# EAGLE board Simple JWS (EAGLE 7.7.0), part 1 of 2
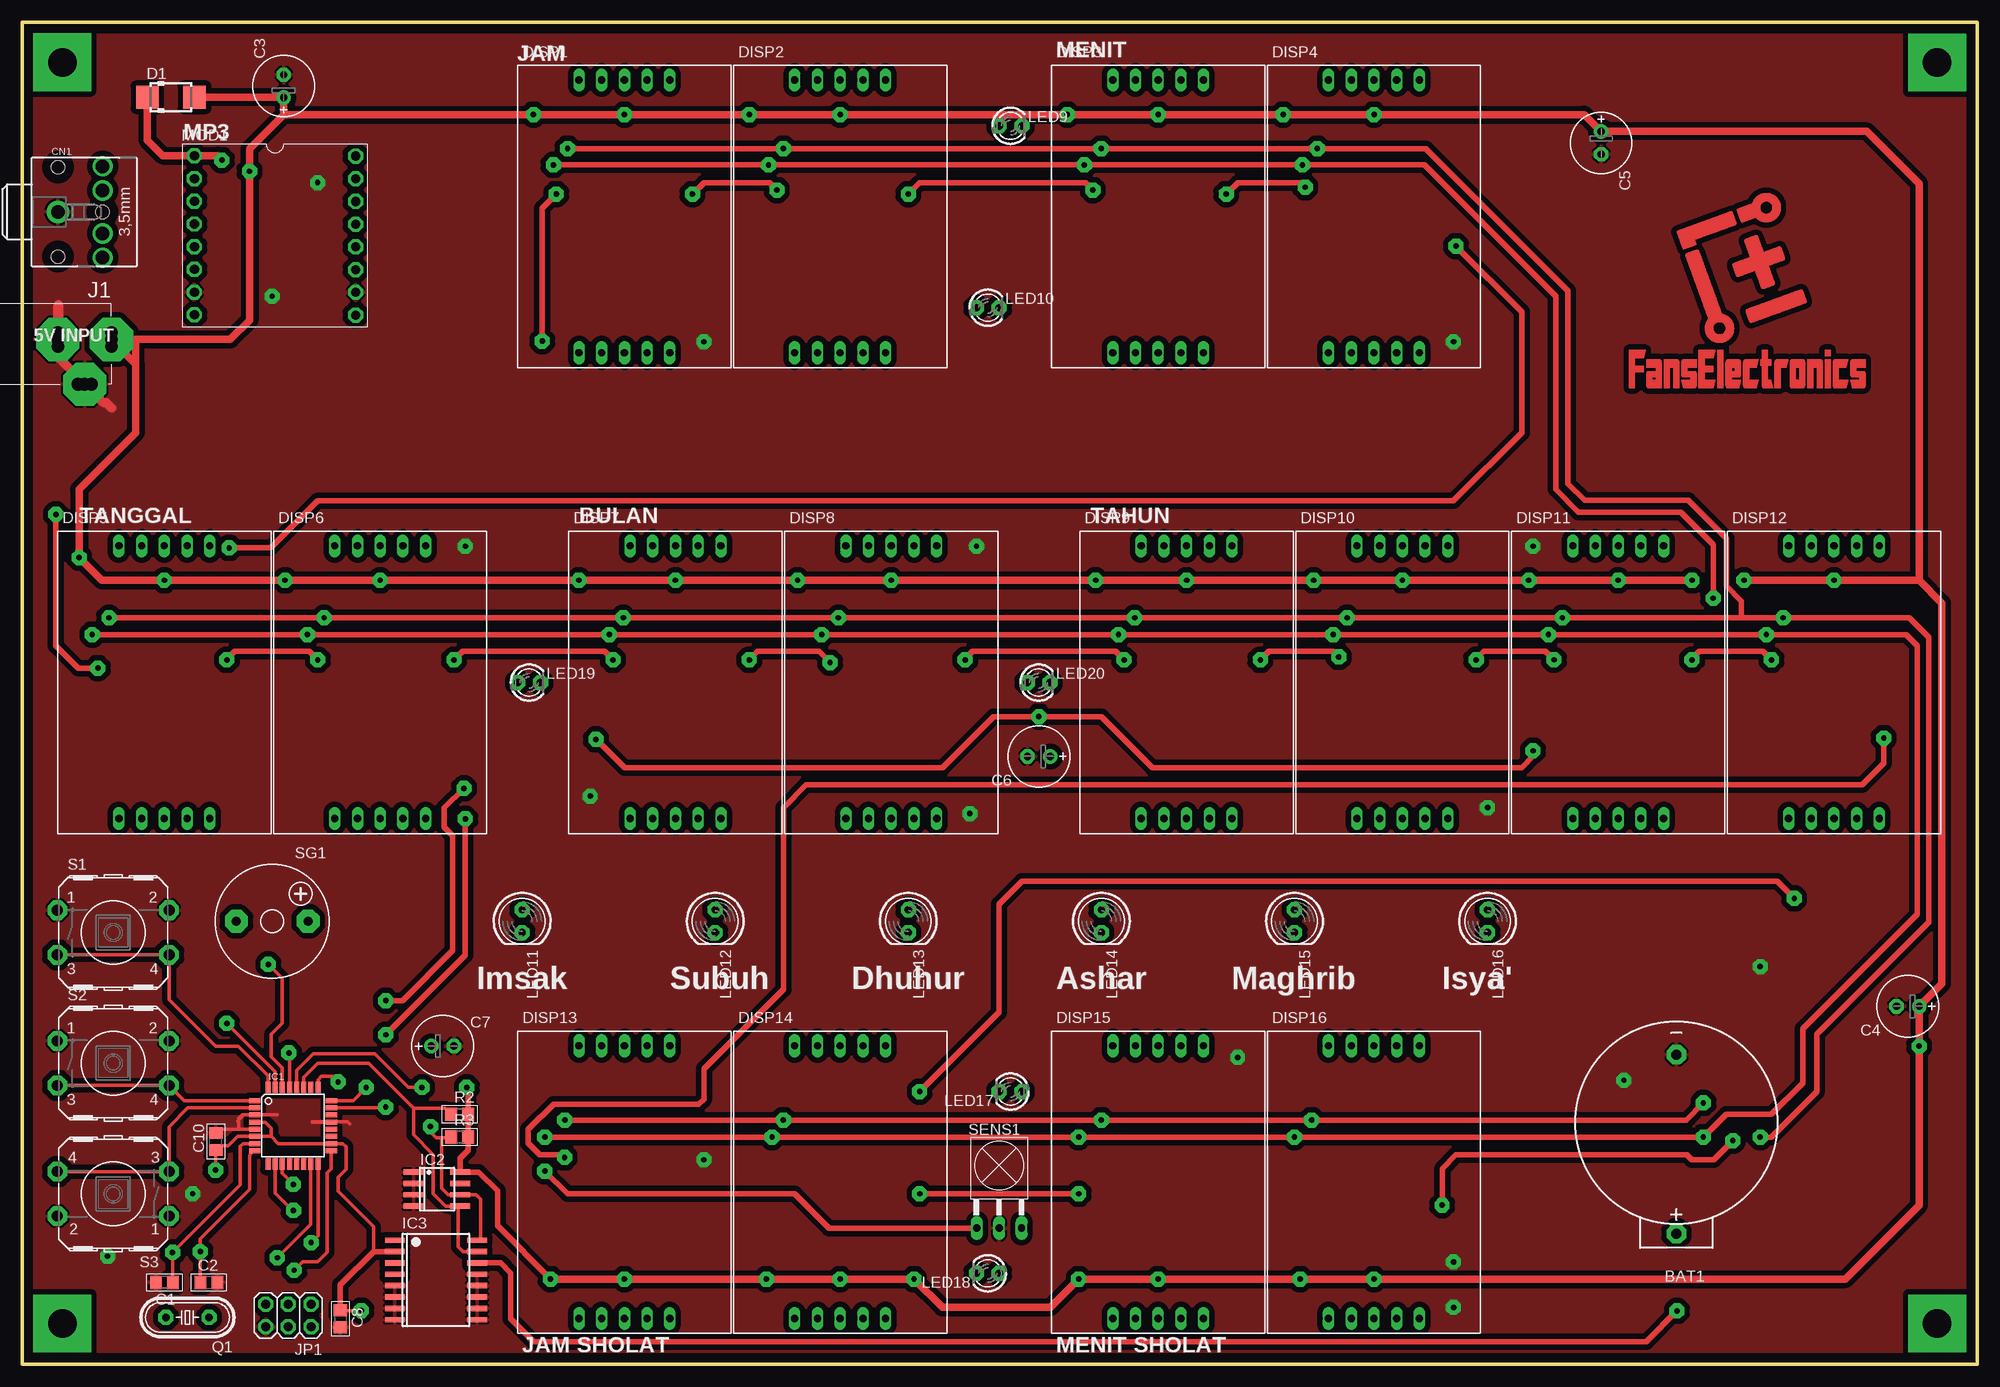
[diagram p0: board, top side]
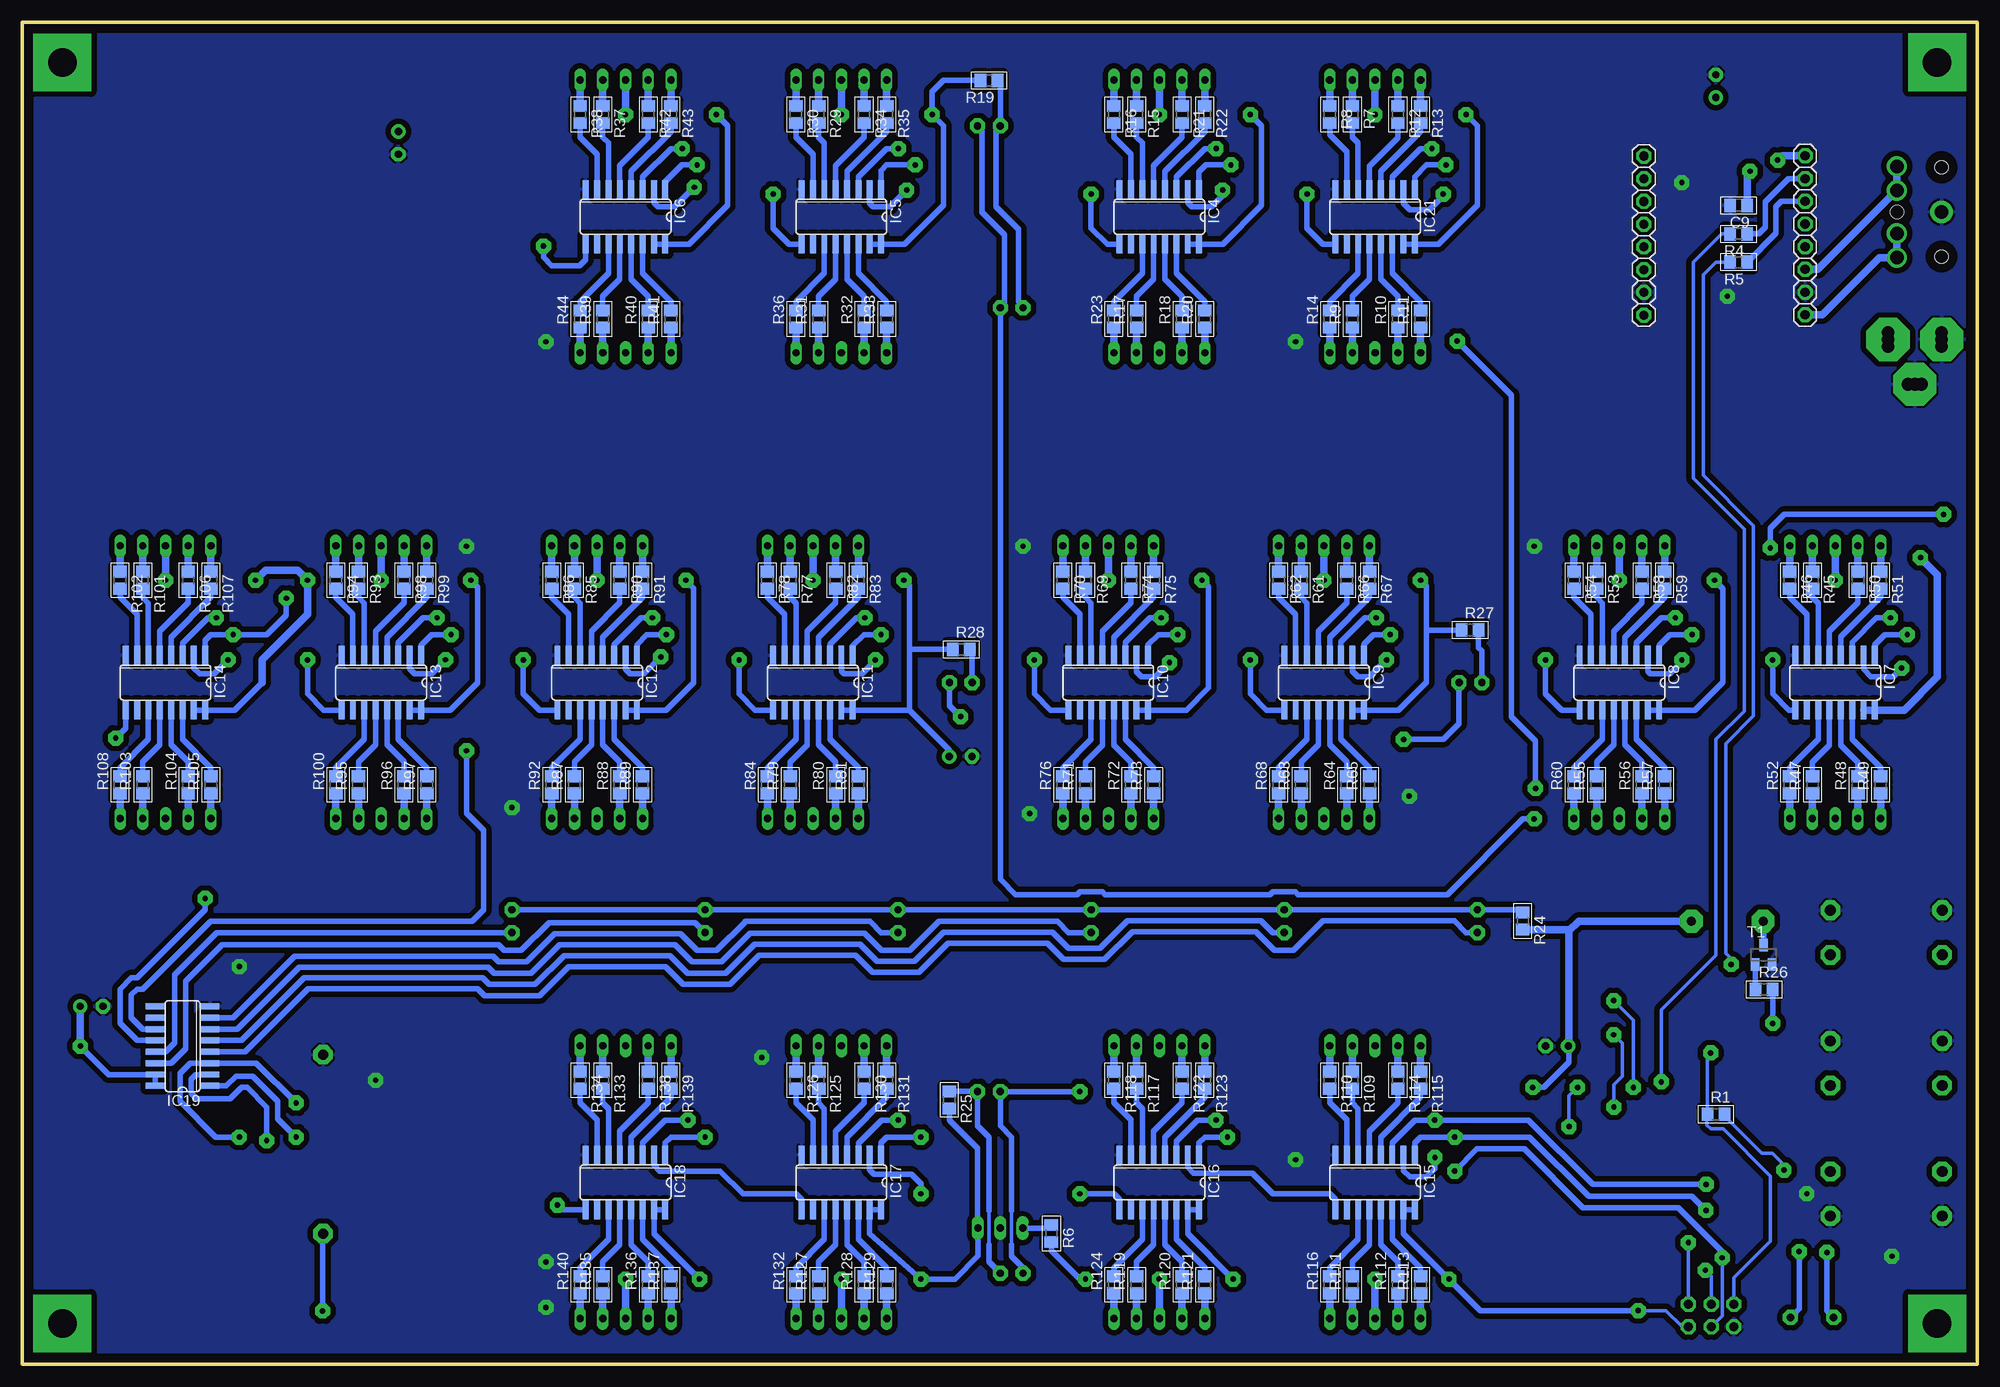
[diagram p1: board, bottom side, seen from below]

Size 218.57 x 150 mm. Coordinates in mm from the lower left corner, seen from the top.
Outline: 0,150 218.57,150 218.57,0 0,0 0,150
Copper layers (1*16): Top 0.035mm / dielectric 1.5mm / Bottom 0.035mm
Design rules "default": minimum track width 10mil, minimum drill 24mil, track to track 8mil, track to pad 8mil, pad to pad 8mil, via to via 8mil, smd to smd 8mil, copper to edge 40mil, drill to drill 8mil, minimum pad ring 10mil, minimum via ring 8mil, stop-mask expansion 4mil, vias tented up to drill 0mil, thermal gap 10mil

## Footprints (pad centres in the part's own frame; a part is rotated, then mirrored left to right if it is on the bottom)
CR2032 = drill 1.1 pad 2.184 octagon: + 0,12.376; - 0,-7.624
C0805 = smd 1.3 x 1.5: 1 -0.95,0; 2 0.95,0
E2,5-7 = drill 0.813 pad 1.6: + -1.27,0 | drill 0.813 pad 1.6 octagon: - 1.27,0
STX3100 = drill 1.5 pad 2.54: 1 2.7,-0.1 | drill 1.5: 2 7.7,5; 3 7.7,2.3; 4 7.7,-2.5; 5 7.7,-5.2 | hole 1.5: 2.7,4.9; 2.7,-5.1; 7.7,-0.1
SMA = smd 2.54 x 2.54: A 2.635,0; C -2.635,0
1INC = drill 0.8 long: 1 -5.08,-15.2; 2 -2.54,-15.2; 3 0,-15.2; 4 2.54,-15.2; 5 5.08,-15.2; 6 5.08,15.28; 7 2.54,15.28; 8 0,15.28; 9 -2.54,15.28; 10 -5.08,15.28
TQFP32-08 = smd 1.27 x 0.559: 1 -4.293,2.8; 2 -4.293,2; 3 -4.293,1.2; 4 -4.293,0.4; 5 -4.293,-0.4; 6 -4.293,-1.2; 7 -4.293,-2; 8 -4.293,-2.8; 17 4.293,-2.8; 18 4.293,-2; 19 4.293,-1.2; 20 4.293,-0.4; 21 4.293,0.4; 22 4.293,1.2; 23 4.293,2; 24 4.293,2.8 | smd 0.559 x 1.27: 9 -2.8,-4.293; 10 -2,-4.293; 11 -1.2,-4.293; 12 -0.4,-4.293; 13 0.4,-4.293; 14 1.2,-4.293; 15 2,-4.293; 16 2.8,-4.293; 25 2.8,4.293; 26 2,4.293; 27 1.2,4.293; 28 0.4,4.293; 29 -0.4,4.293; 30 -1.2,4.293; 31 -2,4.293; 32 -2.8,4.293
SOIC8 = smd 0.6 x 2.2: 1 -1.905,-2.6; 2 -0.635,-2.6; 3 0.635,-2.6; 4 1.905,-2.6; 5 1.905,2.6; 6 0.635,2.6; 7 -0.635,2.6; 8 -1.905,2.6
SO16W = smd 0.6 x 2.2: 1 -4.445,-4.6; 2 -3.175,-4.6; 3 -1.905,-4.6; 4 -0.635,-4.6; 5 0.635,-4.6; 6 1.905,-4.6; 7 3.175,-4.6; 8 4.445,-4.6; 9 4.445,4.6; 10 3.175,4.6; 11 1.905,4.6; 12 0.635,4.6; 13 -0.635,4.6; 14 -1.905,4.6; 15 -3.175,4.6; 16 -4.445,4.6
SO16 = smd 0.66 x 2.032: 1 -4.445,-3.073; 2 -3.175,-3.073; 3 -1.905,-3.073; 4 -0.635,-3.073; 5 0.635,-3.073; 6 1.905,-3.073; 7 3.175,-3.073; 8 4.445,-3.073; 9 4.445,3.073; 10 3.175,3.073; 11 1.905,3.073; 12 0.635,3.073; 13 -0.635,3.073; 14 -1.905,3.073; 15 -3.175,3.073; 16 -4.445,3.073
JACK-PCB-ARDUINO = drill 1.4 pad 4.826 octagon: 1 -0.25,2.978; 2 4.754,-0.019; 3 -0.25,-3.016 | drill 1.4: 4 -1.012,2.978; 5 0.512,2.978; 6 4.754,0.743; 7 4.754,-0.781; 8 -1.012,-3.016; 9 0.512,-3.016
2X03 = drill 1.016 pad 1.676 octagon: 1 -2.54,-1.27; 2 -2.54,1.27; 3 0,-1.27; 4 0,1.27; 5 2.54,-1.27; 6 2.54,1.27
LED3MM = drill 0.813 pad 1.676 octagon: A -1.27,0; K 1.27,0
LED5MM = drill 0.813 pad 1.676 octagon: A -1.27,0; K 1.27,0
MINI_MP3 = drill 1.016 pad 1.676 octagon: 1 -9.01,6.65; 2 -9.01,4.11; 3 -9.01,1.57; 4 -9.01,-0.97; 5 -9.01,-3.51; 6 -9.01,-6.05; 7 -9.01,-8.59; 8 -9.01,-11.13; 9 9.01,-11.15; 10 9.01,-8.61; 11 9.01,-6.07; 12 9.01,-3.53; 13 9.01,-0.99; 14 9.01,1.55; 15 9.01,4.09; 16 9.01,6.63
HC49S = drill 0.813 pad 1.676 octagon: 1 -2.413,0; 2 2.413,0
R0805 = smd 1.3 x 1.5: 1 -0.95,0; 2 0.95,0
TACT-12X12MM-O = drill 1.2 pad 2.184 octagon: 1 -6.248,2.489; 2 6.248,2.489; 3 -6.248,-2.489; 4 6.248,-2.489
TSOP18XXH = drill 0.813 long: GND -0.001,-0.027; OUT -2.501,-0.027; VCC 2.499,-0.027
5V = drill 1.016 pad 2.54 octagon: + 4.01,0; - -4.01,0
SOT23 = smd 1 x 1.4: 1 -0.95,-1.1; 2 0.95,-1.1; 3 0,1.1

## Placement (x,y rotation side)
BAT1  3V  [CR2032]  184.95,26.98 180 top
C1  22pf  [C0805]  15.87,9.15 180 top
C2  22pf  [C0805]  20.85,9.15 0 top
C3  10uf/16V  [E2,5-7]  29.21,142.88 90 top
C4  10uf/16V  [E2,5-7]  210.82,40.01 180 top
C5  10uf/16V  [E2,5-7]  176.53,136.53 270 top
C6  10uf/16V  [E2,5-7]  113.67,67.94 180 top
C7  10uf/16V  [E2,5-7]  46.99,35.56 0 top
C8  100nf  [C0805]  35.56,5.08 270 top
C9  100nf  [C0805]  26.67,129.54 180 bottom
C10  100nf  [C0805]  21.63,24.89 90 top
CN1  [STX3100]  1.27,128.91 0 top
D1  M7  [SMA]  16.61,141.64 0 top
DISP1  JAM  [1INC]  67.31,128.27 0 top
DISP2  JAM  [1INC]  91.44,128.27 0 top
DISP3  MENIT  [1INC]  127,128.27 0 top
DISP4  MENIT  [1INC]  151.13,128.27 0 top
DISP5  TANGGAL  [1INC]  15.88,76.2 0 top
DISP6  TANGGAL  [1INC]  40,76.2 0 top
DISP7  BULAN  [1INC]  73.02,76.2 0 top
DISP8  BULAN  [1INC]  97.15,76.2 0 top
DISP9  TAHUN  [1INC]  130.18,76.2 0 top
DISP10  TAHUN  [1INC]  154.31,76.2 0 top
DISP11  TAHUN  [1INC]  178.44,76.2 0 top
DISP12  TAHUN  [1INC]  202.56,76.2 0 top
DISP13  JAM_SHOLAT  [1INC]  67.31,20.32 0 top
DISP14  JAM_SHOLAT  [1INC]  91.44,20.32 0 top
DISP15  MENIT_SHOLAT  [1INC]  127,20.32 0 top
DISP16  MENIT_SHOLAT  [1INC]  151.13,20.32 0 top
IC1  MEGA328  [TQFP32-08]  30.26,26.67 0 top
IC2  24C64-SMD  [SOIC8]  46.35,19.58 270 top
IC3  DS3231-SMD  [SO16W]  46.25,9.42 270 top
IC4  4094D  [SO16]  91.44,128.27 180 bottom
IC5  4094D  [SO16]  127,128.27 180 bottom
IC6  4094D  [SO16]  151.13,128.27 180 bottom
IC7  4094D  [SO16]  15.88,76.2 180 bottom
IC8  4094D  [SO16]  40,76.2 180 bottom
IC9  4094D  [SO16]  73.02,76.2 180 bottom
IC10  4094D  [SO16]  97.15,76.2 180 bottom
IC11  4094D  [SO16]  130.18,76.2 180 bottom
IC12  4094D  [SO16]  154.31,76.2 180 bottom
IC13  4094D  [SO16]  178.44,76.2 180 bottom
IC14  4094D  [SO16]  202.56,76.2 180 bottom
IC15  4094D  [SO16]  67.31,20.32 180 bottom
IC16  4094D  [SO16]  91.44,20.32 180 bottom
IC17  4094D  [SO16]  127,20.32 180 bottom
IC18  4094D  [SO16]  151.13,20.32 180 bottom
IC19  4094D  [SO16]  200.66,35.56 90 bottom
IC21  4094D  [SO16]  67.31,128.27 180 bottom
J1  5V Input  [JACK-PCB-ARDUINO]  6.99,114.3 270 top
JP1  ISP  [2X03]  29.74,5.45 180 top
LED9  BL  [LED3MM]  110.49,138.43 0 top
LED10  BL  [LED3MM]  107.95,118.11 0 top
LED11  LEDLED5MM  [LED5MM]  55.88,49.53 270 top
LED12  LEDLED5MM  [LED5MM]  77.47,49.53 270 top
LED13  LEDLED5MM  [LED5MM]  99.06,49.53 270 top
LED14  LEDLED5MM  [LED5MM]  120.65,49.53 270 top
LED15  LEDLED5MM  [LED5MM]  142.24,49.53 270 top
LED16  LEDLED5MM  [LED5MM]  163.83,49.53 270 top
LED17  DP  [LED3MM]  110.49,30.48 180 top
LED18  DP  [LED3MM]  107.95,10.16 180 top
LED19  LEDLED3MM  [LED3MM]  56.65,76.2 0 top
LED20  LEDLED3MM  [LED3MM]  113.63,76.2 0 top
MOD1  MINI_MP3  [MINI_MP3]  28.25,128.43 0 top
Q1  16Mhz  [HC49S]  18.46,5.23 180 top
R1  10K  [R0805]  29.21,27.94 0 bottom
R2  10K  [R0805]  48.9,27.94 0 top
R3  10K  [R0805]  48.9,25.4 0 top
R4  1K  [R0805]  26.67,126.36 180 bottom
R5  1K  [R0805]  26.67,123.19 180 bottom
R6  10K  [R0805]  103.5,14.61 270 bottom
R7  100  [R0805]  69.85,139.7 270 bottom
R8  100  [R0805]  72.39,139.7 270 bottom
R9  100  [R0805]  69.85,116.84 90 bottom
R10  100  [R0805]  64.77,116.84 90 bottom
R11  100  [R0805]  62.23,116.84 90 bottom
R12  100  [R0805]  64.77,139.7 270 bottom
R13  100  [R0805]  62.23,139.7 270 bottom
R14  100  [R0805]  72.39,116.84 90 bottom
R15  100  [R0805]  93.98,139.7 270 bottom
R16  100  [R0805]  96.52,139.7 270 bottom
R17  100  [R0805]  93.98,116.84 90 bottom
R18  100  [R0805]  88.9,116.84 90 bottom
R19  330  [R0805]  110.49,143.51 180 bottom
R20  100  [R0805]  86.36,116.84 90 bottom
R21  100  [R0805]  88.9,139.7 270 bottom
R22  100  [R0805]  86.36,139.7 270 bottom
R23  100  [R0805]  96.52,116.84 90 bottom
R24  330  [R0805]  50.8,49.53 270 bottom
R25  330  [R0805]  114.91,29.55 270 bottom
R26  330  [R0805]  23.83,41.91 0 bottom
R27  330  [R0805]  56.69,82.06 0 bottom
R28  330  [R0805]  113.6,79.91 0 bottom
R29  100  [R0805]  129.54,139.7 270 bottom
R30  100  [R0805]  132.08,139.7 270 bottom
R31  100  [R0805]  129.54,116.84 90 bottom
R32  100  [R0805]  124.46,116.84 90 bottom
R33  100  [R0805]  121.92,116.84 90 bottom
R34  100  [R0805]  124.46,139.7 270 bottom
R35  100  [R0805]  121.92,139.7 270 bottom
R36  100  [R0805]  132.08,116.84 90 bottom
R37  100  [R0805]  153.67,139.7 270 bottom
R38  100  [R0805]  156.21,139.7 270 bottom
R39  100  [R0805]  153.67,116.84 90 bottom
R40  100  [R0805]  148.59,116.84 90 bottom
R41  100  [R0805]  146.05,116.84 90 bottom
R42  100  [R0805]  148.59,139.7 270 bottom
R43  100  [R0805]  146.05,139.7 270 bottom
R44  100  [R0805]  156.21,116.84 90 bottom
R45  100  [R0805]  18.41,87.63 270 bottom
R46  100  [R0805]  20.96,87.63 270 bottom
R47  100  [R0805]  18.41,64.77 90 bottom
R48  100  [R0805]  13.34,64.77 90 bottom
R49  100  [R0805]  10.79,64.77 90 bottom
R50  100  [R0805]  13.34,87.63 270 bottom
R51  100  [R0805]  10.79,87.63 270 bottom
R52  100  [R0805]  20.96,64.77 90 bottom
R53  100  [R0805]  42.54,87.63 270 bottom
R54  100  [R0805]  45.09,87.63 270 bottom
R55  100  [R0805]  42.54,64.77 90 bottom
R56  100  [R0805]  37.47,64.77 90 bottom
R57  100  [R0805]  34.93,64.77 90 bottom
R58  100  [R0805]  37.47,87.63 270 bottom
R59  100  [R0805]  34.93,87.63 270 bottom
R60  100  [R0805]  45.09,64.77 90 bottom
R61  100  [R0805]  75.56,87.63 270 bottom
R62  100  [R0805]  78.11,87.63 270 bottom
R63  100  [R0805]  75.56,64.77 90 bottom
R64  100  [R0805]  70.49,64.77 90 bottom
R65  100  [R0805]  67.94,64.77 90 bottom
R66  100  [R0805]  70.49,87.63 270 bottom
R67  100  [R0805]  67.94,87.63 270 bottom
R68  100  [R0805]  78.11,64.77 90 bottom
R69  100  [R0805]  99.69,87.63 270 bottom
R70  100  [R0805]  102.24,87.63 270 bottom
R71  100  [R0805]  99.69,64.77 90 bottom
R72  100  [R0805]  94.62,64.77 90 bottom
R73  100  [R0805]  92.07,64.77 90 bottom
R74  100  [R0805]  94.62,87.63 270 bottom
R75  100  [R0805]  92.07,87.63 270 bottom
R76  100  [R0805]  102.24,64.77 90 bottom
R77  100  [R0805]  132.71,87.63 270 bottom
R78  100  [R0805]  135.25,87.63 270 bottom
R79  100  [R0805]  132.71,64.77 90 bottom
R80  100  [R0805]  127.63,64.77 90 bottom
R81  100  [R0805]  125.1,64.77 90 bottom
R82  100  [R0805]  127.63,87.63 270 bottom
R83  100  [R0805]  125.1,87.63 270 bottom
R84  100  [R0805]  135.25,64.77 90 bottom
R85  100  [R0805]  156.85,87.63 270 bottom
R86  100  [R0805]  159.38,87.63 270 bottom
R87  100  [R0805]  156.85,64.77 90 bottom
R88  100  [R0805]  151.76,64.77 90 bottom
R89  100  [R0805]  149.23,64.77 90 bottom
R90  100  [R0805]  151.76,87.63 270 bottom
R91  100  [R0805]  149.23,87.63 270 bottom
R92  100  [R0805]  159.38,64.77 90 bottom
R93  100  [R0805]  180.98,87.63 270 bottom
R94  100  [R0805]  183.51,87.63 270 bottom
R95  100  [R0805]  180.98,64.77 90 bottom
R96  100  [R0805]  175.89,64.77 90 bottom
R97  100  [R0805]  173.36,64.77 90 bottom
R98  100  [R0805]  175.89,87.63 270 bottom
R99  100  [R0805]  173.36,87.63 270 bottom
R100  100  [R0805]  183.51,64.77 90 bottom
R101  100  [R0805]  205.11,87.63 270 bottom
R102  100  [R0805]  207.64,87.63 270 bottom
R103  100  [R0805]  205.11,64.77 90 bottom
R104  100  [R0805]  200.02,64.77 90 bottom
R105  100  [R0805]  197.49,64.77 90 bottom
R106  100  [R0805]  200.02,87.63 270 bottom
R107  100  [R0805]  197.49,87.63 270 bottom
R108  100  [R0805]  207.64,64.77 90 bottom
R109  100  [R0805]  69.85,31.75 270 bottom
R110  100  [R0805]  72.39,31.75 270 bottom
R111  100  [R0805]  69.85,8.89 90 bottom
R112  100  [R0805]  64.77,8.89 90 bottom
R113  100  [R0805]  62.23,8.89 90 bottom
R114  100  [R0805]  64.77,31.75 270 bottom
R115  100  [R0805]  62.23,31.75 270 bottom
R116  100  [R0805]  72.39,8.89 90 bottom
R117  100  [R0805]  93.98,31.75 270 bottom
R118  100  [R0805]  96.52,31.75 270 bottom
R119  100  [R0805]  93.98,8.89 90 bottom
R120  100  [R0805]  88.9,8.89 90 bottom
R121  100  [R0805]  86.36,8.89 90 bottom
R122  100  [R0805]  88.9,31.75 270 bottom
R123  100  [R0805]  86.36,31.75 270 bottom
R124  100  [R0805]  96.52,8.89 90 bottom
R125  100  [R0805]  129.54,31.75 270 bottom
R126  100  [R0805]  132.08,31.75 270 bottom
R127  100  [R0805]  129.54,8.89 90 bottom
R128  100  [R0805]  124.46,8.89 90 bottom
R129  100  [R0805]  121.92,8.89 90 bottom
R130  100  [R0805]  124.46,31.75 270 bottom
R131  100  [R0805]  121.92,31.75 270 bottom
R132  100  [R0805]  132.08,8.89 90 bottom
R133  100  [R0805]  153.67,31.75 270 bottom
R134  100  [R0805]  156.21,31.75 270 bottom
R135  100  [R0805]  153.67,8.89 90 bottom
R136  100  [R0805]  148.59,8.89 90 bottom
R137  100  [R0805]  146.05,8.89 90 bottom
R138  100  [R0805]  148.59,31.75 270 bottom
R139  100  [R0805]  146.05,31.75 270 bottom
R140  100  [R0805]  156.21,8.89 90 bottom
S1  UP  [TACT-12X12MM-O]  10.16,48.26 0 top
S2  OK  [TACT-12X12MM-O]  10.16,33.66 0 top
S3  DN  [TACT-12X12MM-O]  10.16,19.05 180 top
SENS1  TSOP1838-H  [TSOP18XXH]  109.22,15.24 0 top
SG1  5V-PCB  [5V]  27.94,49.53 0 top
T1  BC847  [SOT23]  23.88,45.77 0 bottom

## Library data of the parts
BAT1 = FansElectronics-Battery
C1-C10 R1-R140 = FansElectronics-RCL
CN1 = microbuilder
D1 = FansElectronics-Diode
DISP1-DISP16 = FansElectronics-7Segmen
IC1 = FansElectronics-Atmel; MPN: ATMEGA8-16AU; OC_FARNELL: 9171371; OC_NEWARK: 73M8863
IC2 = FansElectronics-EEPROM
IC3 = FansElectronics-RTC
IC4-IC19 IC21 = 40xx
J1 = FansElectronics-Con-Jack
JP1 = FansElectronics-Header
LED9-LED20 = FansElectronics-LED
MOD1 = FansElectronics-Modul
Q1 = FansElectronics-Crystal
S1-S3 = FansElectronics-Switch
SENS1 = FansElectronics-Sensor
SG1 = FansElectronics-Buzzer
T1 = transistor

## Nets
+5V: C3.+ C4.+ C5.+ C6.+ C7.+ C8.1 C9.1 C10.1 D1.A DISP1.8 DISP2.8 DISP3.8 DISP4.8 DISP5.8 DISP6.8 DISP7.8 DISP8.8 DISP9.8 DISP10.8 DISP11.8 DISP12.8 DISP13.3 DISP14.3 DISP15.3 DISP16.3 IC1.4 IC1.6 IC1.18 IC2.8 IC3.2 IC4.15 IC4.16 IC5.15 IC5.16 IC6.15 IC6.16 IC7.15 IC7.16 IC8.15 IC8.16 IC9.15 IC9.16 IC10.15 IC10.16 IC11.15 IC11.16 IC12.15 IC12.16 IC13.15 IC13.16 IC14.15 IC14.16 IC15.15 IC15.16 IC16.15 IC16.16 IC17.15 IC17.16 IC18.15 IC18.16 IC19.15 IC19.16 IC21.15 IC21.16 J1.1 JP1.2 R1.2 R2.2 R3.2 R6.2 R19.2 R24.2 R25.2 R27.1 R28.1 SENS1.VCC SG1.+
A3: IC1.26
A6: IC1.19
A7: IC1.22
B_DN: IC1.2 S3.3 S3.4
B_OK: IC1.1 S2.3 S2.4
B_UP: IC1.32 S1.3 S1.4
BL: IC1.23 LED9.K LED10.K
BUZZER: IC1.31 R26.2
CLOCK: IC1.11 IC4.3 IC5.3 IC6.3 IC7.3 IC8.3 IC9.3 IC10.3 IC11.3 IC12.3 IC13.3 IC14.3 IC15.3 IC16.3 IC17.3 IC18.3 IC19.3 IC21.3
D5: IC1.9
DATA: IC1.24 IC21.2
DATA_2: IC4.2 IC21.9
DATA_3: IC4.9 IC5.2
DATA_4: IC5.9 IC6.2
DATA_5: IC6.9 IC7.2
DATA_6: IC7.9 IC8.2
DATA_7: IC8.9 IC9.2
DATA_8: IC9.9 IC10.2
DATA_9: IC10.9 IC11.2
DATA_10: IC11.9 IC12.2
DATA_11: IC12.9 IC13.2
DATA_12: IC13.9 IC14.2
DATA_13: IC14.9 IC15.2
DATA_14: IC15.9 IC16.2
DATA_15: IC16.9 IC17.2
DATA_16: IC17.9 IC18.2
DATA_17: IC18.9 IC19.2
GND: BAT1.- C1.2 C2.2 C3.- C4.- C5.- C6.- C7.- C8.2 C9.2 C10.2 CN1.1 IC1.3 IC1.5 IC1.21 IC2.1 IC2.2 IC2.3 IC2.4 IC3.5 IC3.6 IC3.7 IC3.8 IC3.9 IC3.10 IC3.11 IC3.12 IC3.13 IC4.8 IC5.8 IC6.8 IC7.8 IC8.8 IC9.8 IC10.8 IC11.8 IC12.8 IC13.8 IC14.8 IC15.8 IC16.8 IC17.8 IC18.8 IC19.8 IC21.8 J1.2 J1.3 JP1.6 MOD1.7 MOD1.10 S1.1 S1.2 S2.1 S2.2 S3.1 S3.2 SENS1.GND T1.2
LATCH: IC1.10 IC4.1 IC5.1 IC6.1 IC7.1 IC8.1 IC9.1 IC10.1 IC11.1 IC12.1 IC13.1 IC14.1 IC15.1 IC16.1 IC17.1 IC18.1 IC19.1 IC21.1
LED_DATE: IC19.11 LED19.K LED20.K
LED_JWS: IC19.12 LED17.K LED18.K
MISO: IC1.16 JP1.1
MOSI: IC1.15 JP1.4 R6.1 SENS1.OUT
MP3_RX: IC1.25 R4.2
MP3_TX: IC1.30 R5.2
N$1: C2.1 IC1.8 Q1.1
N$2: C1.1 IC1.7 Q1.2
N$3: DISP1.7 R7.1
N$4: DISP1.6 R8.1
N$5: DISP1.4 R9.1
N$6: DISP1.2 R10.1
N$7: DISP1.1 R11.1
N$8: MOD1.2 R4.1
N$9: MOD1.3 R5.1
N$10: DISP1.9 R12.1
N$11: DISP1.10 R13.1
N$12: IC21.11 R14.2
N$13: IC21.6 R7.2
N$14: SG1.- T1.3
N$15: R26.1 T1.1
N$16: IC21.7 R8.2
N$17: IC21.14 R11.2
N$18: IC21.13 R10.2
N$19: IC1.12
N$20: IC1.13
N$21: IC1.14
N$22: IC21.12 R9.2
N$23: DISP1.5 R14.1
N$24: IC21.5 R12.2
N$25: BAT1.+ IC3.14
N$26: IC21.4 R13.2
N$27: DISP2.7 R15.1
N$28: DISP2.6 R16.1
N$29: DISP2.4 R17.1
N$30: DISP2.2 R18.1
N$31: LED9.A LED10.A R19.1
N$32: IC19.4 LED11.K
N$33: IC19.5 LED12.K
N$34: IC19.6 LED13.K
N$35: IC19.7 LED14.K
N$36: IC19.14 LED15.K
N$37: IC19.13 LED16.K
N$38: LED11.A LED12.A LED13.A LED14.A LED15.A LED16.A R24.1
N$39: LED17.A LED18.A R25.1
N$40: D1.C MOD1.1
N$41: LED19.A R27.2
N$42: DISP2.1 R20.1
N$44: LED20.A R28.2
N$45: DISP2.9 R21.1
N$46: DISP2.10 R22.1
N$47: IC4.6 R15.2
N$48: IC4.7 R16.2
N$49: IC4.14 R20.2
N$50: IC4.13 R18.2
N$51: IC4.12 R17.2
N$52: IC4.11 R23.2
N$53: DISP2.5 R23.1
N$54: IC4.5 R21.2
N$55: IC4.4 R22.2
N$56: DISP3.7 R29.1
N$57: DISP3.6 R30.1
N$58: DISP3.4 R31.1
N$59: DISP3.2 R32.1
N$60: DISP3.1 R33.1
N$61: DISP3.9 R34.1
N$62: DISP3.10 R35.1
N$63: IC5.6 R29.2
N$64: IC5.7 R30.2
N$65: IC5.14 R33.2
N$66: IC5.13 R32.2
N$67: IC5.12 R31.2
N$68: IC5.11 R36.2
N$69: DISP3.5 R36.1
N$70: IC5.5 R34.2
N$71: IC5.4 R35.2
N$72: DISP4.7 R37.1
N$73: DISP4.6 R38.1
N$74: DISP4.4 R39.1
N$75: DISP4.2 R40.1
N$76: DISP4.1 R41.1
N$77: DISP4.9 R42.1
N$78: DISP4.10 R43.1
N$79: IC6.6 R37.2
N$80: IC6.7 R38.2
N$81: IC6.14 R41.2
N$82: IC6.13 R40.2
N$83: IC6.12 R39.2
N$84: IC6.11 R44.2
N$85: DISP4.5 R44.1
N$86: IC6.5 R42.2
N$87: IC6.4 R43.2
N$88: DISP5.7 R45.1
N$89: DISP5.6 R46.1
N$90: DISP5.4 R47.1
N$91: DISP5.2 R48.1
N$92: DISP5.1 R49.1
N$93: DISP5.9 R50.1
N$94: DISP5.10 R51.1
N$95: IC7.6 R45.2
N$96: IC7.7 R46.2
N$97: IC7.14 R49.2
N$98: IC7.13 R48.2
N$99: IC7.12 R47.2
N$100: IC7.11 R52.2
N$101: DISP5.5 R52.1
N$102: IC7.5 R50.2
N$103: IC7.4 R51.2
N$104: DISP6.7 R53.1
N$105: DISP6.6 R54.1
N$106: DISP6.4 R55.1
N$107: DISP6.2 R56.1
N$108: DISP6.1 R57.1
N$109: DISP6.9 R58.1
N$110: DISP6.10 R59.1
N$111: IC8.6 R53.2
N$112: IC8.7 R54.2
N$113: IC8.14 R57.2
N$114: IC8.13 R56.2
N$115: IC8.12 R55.2
N$116: IC8.11 R60.2
N$117: DISP6.5 R60.1
N$118: IC8.5 R58.2
N$119: IC8.4 R59.2
N$120: DISP7.7 R61.1
N$121: DISP7.6 R62.1
N$122: DISP7.4 R63.1
N$123: DISP7.2 R64.1
N$124: DISP7.1 R65.1
N$125: DISP7.9 R66.1
N$126: DISP7.10 R67.1
N$127: IC9.6 R61.2
N$128: IC9.7 R62.2
N$129: IC9.14 R65.2
N$130: IC9.13 R64.2
N$131: IC9.12 R63.2
N$132: IC9.11 R68.2
N$133: DISP7.5 R68.1
N$134: IC9.5 R66.2
N$135: IC9.4 R67.2
N$136: DISP8.7 R69.1
N$137: DISP8.6 R70.1
N$138: DISP8.4 R71.1
N$139: DISP8.2 R72.1
N$140: DISP8.1 R73.1
N$141: DISP8.9 R74.1
N$142: DISP8.10 R75.1
N$143: IC10.6 R69.2
N$144: IC10.7 R70.2
N$145: IC10.14 R73.2
N$146: IC10.13 R72.2
N$147: IC10.12 R71.2
N$148: IC10.11 R76.2
N$149: DISP8.5 R76.1
N$150: IC10.5 R74.2
N$151: IC10.4 R75.2
N$152: DISP9.7 R77.1
N$153: DISP9.6 R78.1
N$154: DISP9.4 R79.1
N$155: DISP9.2 R80.1
N$156: DISP9.1 R81.1
N$157: DISP9.9 R82.1
N$158: DISP9.10 R83.1
N$159: IC11.6 R77.2
N$160: IC11.7 R78.2
N$161: IC11.14 R81.2
N$162: IC11.13 R80.2
N$163: IC11.12 R79.2
N$164: IC11.11 R84.2
N$165: DISP9.5 R84.1
N$166: IC11.5 R82.2
N$167: IC11.4 R83.2
N$168: DISP10.7 R85.1
N$169: DISP10.6 R86.1
N$170: DISP10.4 R87.1
N$171: DISP10.2 R88.1
N$172: DISP10.1 R89.1
N$173: DISP10.9 R90.1
N$174: DISP10.10 R91.1
N$175: IC12.6 R85.2
N$176: IC12.7 R86.2
N$177: IC12.14 R89.2
N$178: IC12.13 R88.2
N$179: IC12.12 R87.2
N$180: IC12.11 R92.2
N$181: DISP10.5 R92.1
N$182: IC12.5 R90.2
N$183: IC12.4 R91.2
N$184: DISP11.7 R93.1
N$185: DISP11.6 R94.1
N$186: DISP11.4 R95.1
N$187: DISP11.2 R96.1
N$188: DISP11.1 R97.1
N$189: DISP11.9 R98.1
N$190: DISP11.10 R99.1
N$191: IC13.6 R93.2
N$192: IC13.7 R94.2
N$193: IC13.14 R97.2
N$194: IC13.13 R96.2
N$195: IC13.12 R95.2
N$196: IC13.11 R100.2
N$197: DISP11.5 R100.1
N$198: IC13.5 R98.2
N$199: IC13.4 R99.2
N$200: DISP12.7 R101.1
N$201: DISP12.6 R102.1
N$202: DISP12.4 R103.1
N$203: DISP12.2 R104.1
N$204: DISP12.1 R105.1
N$205: DISP12.9 R106.1
N$206: DISP12.10 R107.1
N$207: IC14.6 R101.2
N$208: IC14.7 R102.2
N$209: IC14.14 R105.2
N$210: IC14.13 R104.2
N$211: IC14.12 R103.2
N$212: IC14.11 R108.2
N$213: DISP12.5 R108.1
N$214: IC14.5 R106.2
N$215: IC14.4 R107.2
N$216: DISP13.7 R109.1
N$217: DISP13.6 R110.1
N$218: DISP13.4 R111.1
N$219: DISP13.2 R112.1
N$220: DISP13.1 R113.1
N$221: DISP13.9 R114.1
N$222: DISP13.10 R115.1
N$223: IC15.6 R109.2
N$224: IC15.7 R110.2
N$225: IC15.14 R113.2
N$226: IC15.13 R112.2
N$227: IC15.12 R111.2
N$228: IC15.11 R116.2
N$229: DISP13.5 R116.1
N$230: IC15.5 R114.2
N$231: IC15.4 R115.2
N$232: DISP14.7 R117.1
N$233: DISP14.6 R118.1
N$234: DISP14.4 R119.1
N$235: DISP14.2 R120.1
N$236: DISP14.1 R121.1
N$237: DISP14.9 R122.1
N$238: DISP14.10 R123.1
N$239: IC16.6 R117.2
N$240: IC16.7 R118.2
N$241: IC16.14 R121.2
N$242: IC16.13 R120.2
N$243: IC16.12 R119.2
N$244: IC16.11 R124.2
N$245: DISP14.5 R124.1
N$246: IC16.5 R122.2
N$247: IC16.4 R123.2
N$248: DISP15.7 R125.1
N$249: DISP15.6 R126.1
N$250: DISP15.4 R127.1
N$251: DISP15.2 R128.1
N$252: DISP15.1 R129.1
N$253: DISP15.9 R130.1
N$254: DISP15.10 R131.1
N$255: IC17.6 R125.2
N$256: IC17.7 R126.2
N$257: IC17.14 R129.2
N$258: IC17.13 R128.2
N$259: IC17.12 R127.2
N$260: IC17.11 R132.2
N$261: DISP15.5 R132.1
N$262: IC17.5 R130.2
N$263: IC17.4 R131.2
N$264: DISP16.7 R133.1
N$265: DISP16.6 R134.1
N$266: DISP16.4 R135.1
N$267: DISP16.2 R136.1
N$268: DISP16.1 R137.1
N$269: DISP16.9 R138.1
N$270: DISP16.10 R139.1
N$271: IC18.6 R133.2
N$272: IC18.7 R134.2
N$273: IC18.14 R137.2
N$274: IC18.13 R136.2
N$275: IC18.12 R135.2
N$276: IC18.11 R140.2
N$277: DISP16.5 R140.1
N$278: IC18.5 R138.2
N$279: IC18.4 R139.2
RESET: IC1.29 JP1.5 R1.1
SCK: IC1.17 JP1.3
SCL: IC1.28 IC2.6 IC3.16 R3.1
SDA: IC1.27 IC2.5 IC3.15 R2.1
SPK_L: CN1.4 CN1.5 MOD1.8
SPK_R: CN1.2 CN1.3 MOD1.6